# Altium PCB RESET_BOARD_VIA_ETHERNET.PcbDoc
Units mil, origin at the board's own origin, x right, y up, seen from the top; angles counter-clockwise.
Board outline 4150 x 2300 mil, 2 copper layers (Top Layer, Bottom Layer); 16 components, 0 nets, 96 pads, 0 vias.
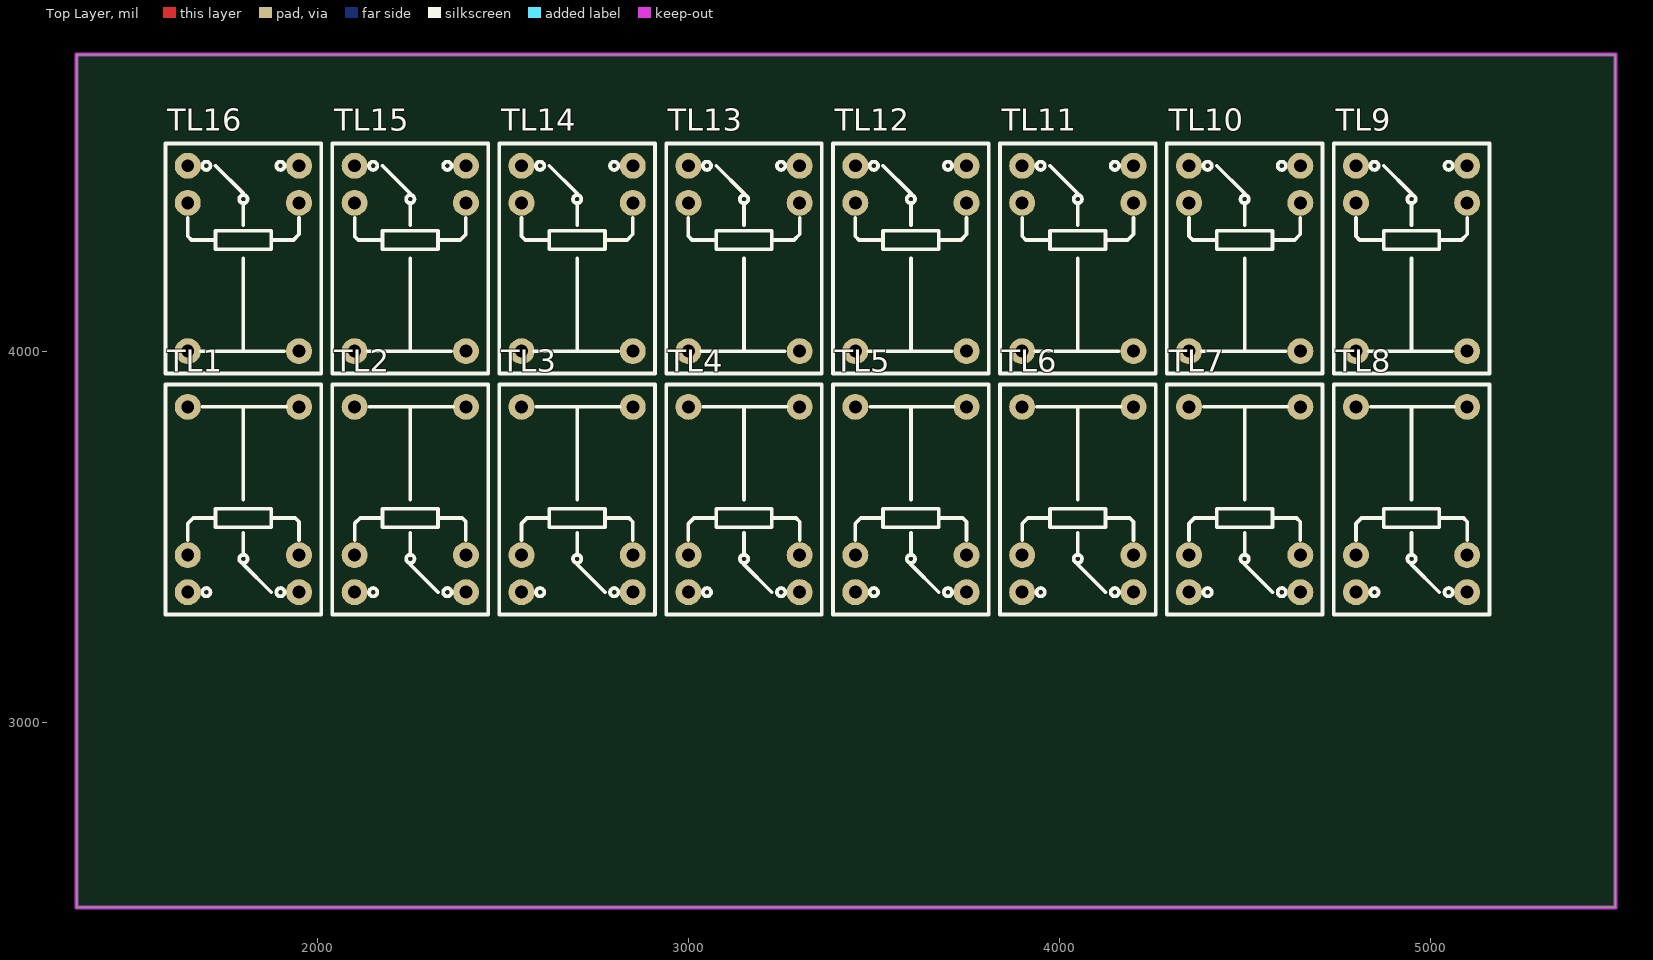
[diagram p0: Top Layer view]
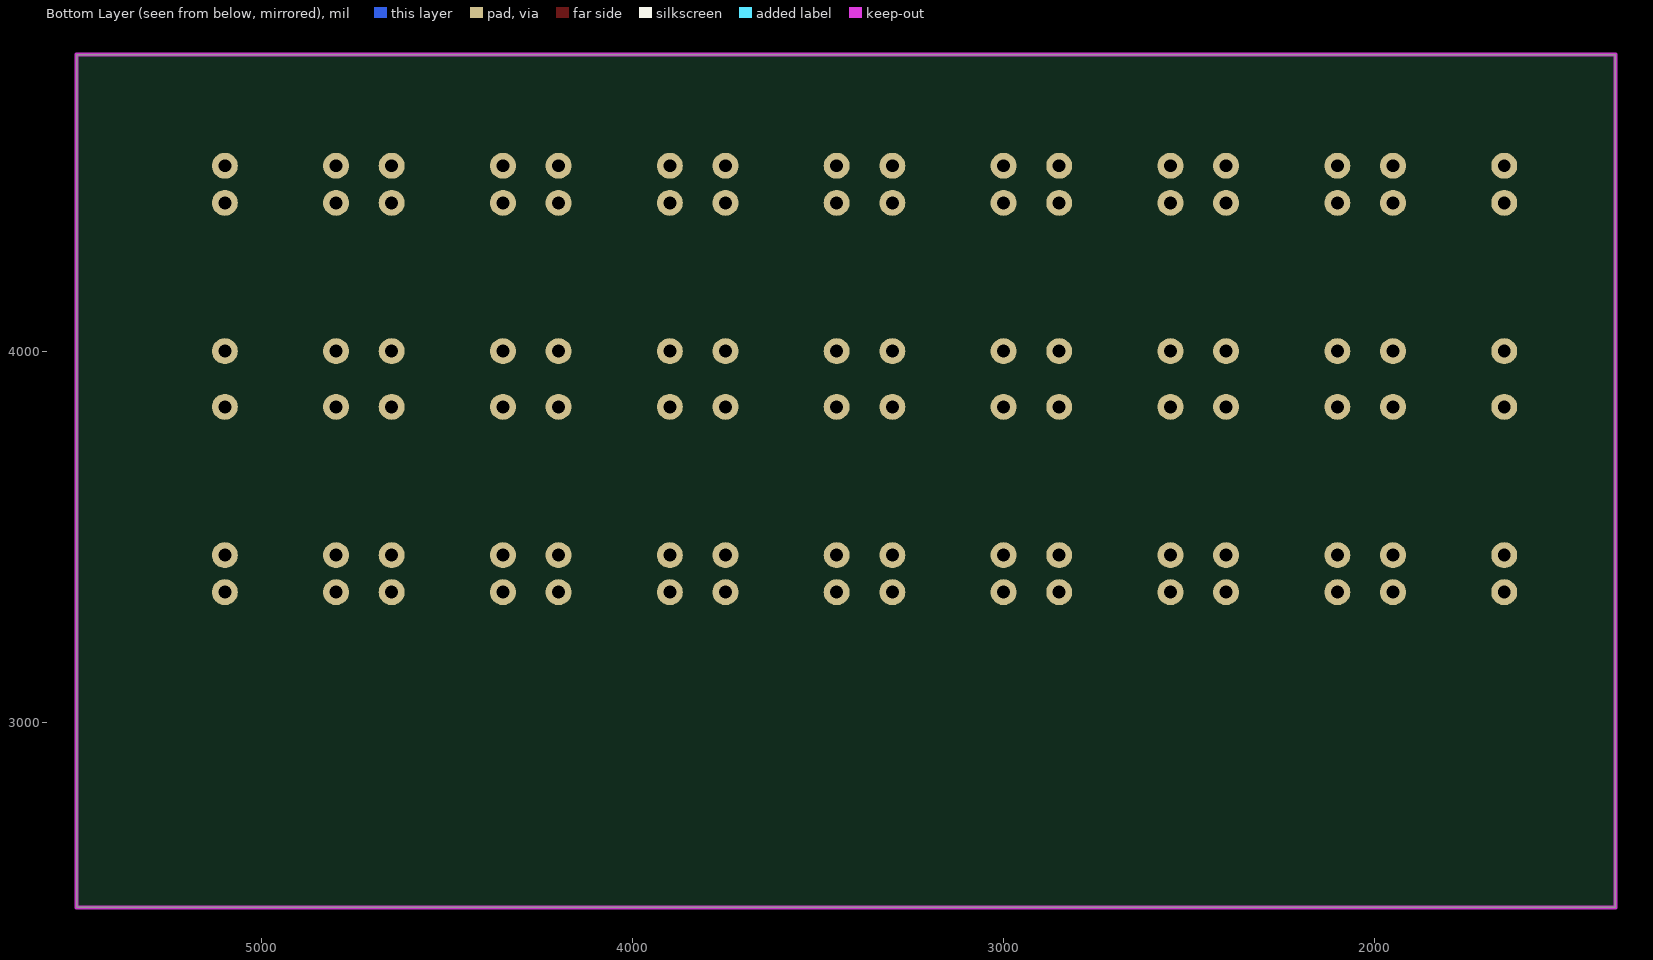
[diagram p1: Bottom Layer view, seen from below]

## Layer stack, top to bottom
Top Solder: solder mask 0.4, Solder Resist, Dk 3.5
Top Layer: signal copper 1.4
Dielectric 1: dielectric 12.6, FR-4, Dk 4.8
Bottom Layer: signal copper 1.4
Bottom Solder: solder mask 0.4, Solder Resist, Dk 3.5

## Board outline
1350,2500 5500,2500 5500,4800 1350,4800

## Design rules (kind name [scope] priority, off if disabled: settings)
Clearance [All] p1: gap=10 ignorepadtopadclearanceinfootprint=FALSE except(0: Arc-Hole Track-Hole SMDPad-Hole THPad-Hole Via-Hole Fill-Hole Poly-Hole Region-Hole Text-Hole)
PolygonConnect [All] p1: connectstyle=Relief reliefconductorwidth=10 reliefentries=4 polygonreliefangle="90 Angle" airgapwidth=10
RoutingVias [All] p1: holewidth=28 width=50 viastyle="Through Hole" minholewidth=28 minwidth=50 maxholewidth=28 maxwidth=50
SolderMaskExpansion [All] p1: expansion=4 istentingtop=FALSE
Width [All] p1: maxlimit=10 minlimit=10 preferedwidth=10
30 further rules are at their usual default settings.

## Components (designator, comment, footprint, x,y, rotation, side; value= is the part's Value field where it differs from the comment)
TL1 "HK4100F-DC3V-SHG" RELAY-HK4100F-DC3V-SHG 1800,3600 r0 top
TL2 "HK4100F-DC3V-SHG" RELAY-HK4100F-DC3V-SHG 2250,3600 r0 top
TL3 "HK4100F-DC3V-SHG" RELAY-HK4100F-DC3V-SHG 2700,3600 r0 top
TL4 "HK4100F-DC3V-SHG" RELAY-HK4100F-DC3V-SHG 3150,3600 r0 top
TL5 "HK4100F-DC3V-SHG" RELAY-HK4100F-DC3V-SHG 3600,3600 r0 top
TL6 "HK4100F-DC3V-SHG" RELAY-HK4100F-DC3V-SHG 4050,3600 r0 top
TL7 "HK4100F-DC3V-SHG" RELAY-HK4100F-DC3V-SHG 4500,3600 r0 top
TL8 "HK4100F-DC3V-SHG" RELAY-HK4100F-DC3V-SHG 4950,3600 r0 top
TL9 "HK4100F-DC3V-SHG" RELAY-HK4100F-DC3V-SHG 4950,4250 r180 top
TL10 "HK4100F-DC3V-SHG" RELAY-HK4100F-DC3V-SHG 4500,4250 r180 top
TL11 "HK4100F-DC3V-SHG" RELAY-HK4100F-DC3V-SHG 4050,4250 r180 top
TL12 "HK4100F-DC3V-SHG" RELAY-HK4100F-DC3V-SHG 3600,4250 r180 top
TL13 "HK4100F-DC3V-SHG" RELAY-HK4100F-DC3V-SHG 3150,4250 r180 top
TL14 "HK4100F-DC3V-SHG" RELAY-HK4100F-DC3V-SHG 2700,4250 r180 top
TL15 "HK4100F-DC3V-SHG" RELAY-HK4100F-DC3V-SHG 2250,4250 r180 top
TL16 "HK4100F-DC3V-SHG" RELAY-HK4100F-DC3V-SHG 1800,4250 r180 top

## Footprints (in the part's own frame and the unit in brackets; to place one, negate y for a bottom-side part, rotate by r counter-clockwise, add the part's x,y. Pads: shape width x height; smd on the part's side, far side on the other; paste and mask are expansions set on the pad)
RELAY-HK4100F-DC3V-SHG [mil]
  round 70 hole 35: 1(-150,250) 2(-150,-150) 3(-150,-250) 4(150,-250) 5(150,-150) 6(150,250)
  silkscreen extent -210,-310 210,310, body extent -204,-302 204,303, height 453

## Part data
TL1 TL2 TL3 TL4 TL5 TL6 TL7 TL8 TL9 TL10 TL11 TL12 TL13 TL14 TL15 TL16: library part Relay-HK4100F-DC3V-SHG

## Nets (pads, with @x,y where several pads share a name; then routed paths per layer and width w, separated by ;. In a path a pad name is that pad's centre, name@x,y a point inside that pad or via, vN(x,y) a via of type N, cw(c..) or ccw(c..) an arc to the next point about the centre after c; other vN are vias at no path point)
pads on no net: TL1.1 TL1.2 TL1.3 TL1.4 TL1.5 TL1.6 TL2.1 TL2.2 TL2.3 TL2.4 TL2.5 TL2.6 TL3.1 TL3.2 TL3.3 TL3.4 TL3.5 TL3.6 TL4.1 TL4.2 TL4.3 TL4.4 TL4.5 TL4.6 TL5.1 TL5.2 TL5.3 TL5.4 TL5.5 TL5.6 TL6.1 TL6.2 TL6.3 TL6.4 TL6.5 TL6.6 TL7.1 TL7.2 TL7.3 TL7.4 TL7.5 TL7.6 TL8.1 TL8.2 TL8.3 TL8.4 TL8.5 TL8.6 TL9.1 TL9.2 TL9.3 TL9.4 TL9.5 TL9.6 TL10.1 TL10.2 TL10.3 TL10.4 TL10.5 TL10.6 TL11.1 TL11.2 TL11.3 TL11.4 TL11.5 TL11.6 TL12.1 TL12.2 TL12.3 TL12.4 TL12.5 TL12.6 TL13.1 TL13.2 TL13.3 TL13.4 TL13.5 TL13.6 TL14.1 TL14.2 TL14.3 TL14.4 TL14.5 TL14.6 TL15.1 TL15.2 TL15.3 TL15.4 TL15.5 TL15.6 TL16.1 TL16.2 TL16.3 TL16.4 TL16.5 TL16.6

## Keep-outs
Keep-Out Layer:
  the board outline again, w10